# Altium PCB MiniRobot.PcbDoc.old.PcbDoc
Units mm, origin at the board's own origin, x right, y up, seen from the top; angles counter-clockwise.
Board outline 90 x 85 mm, 2 copper layers (Top Layer, Bottom Layer); 42 components, 47 nets, 170 pads, 4 vias.
Unrouted connection lines stored in the file: 78.
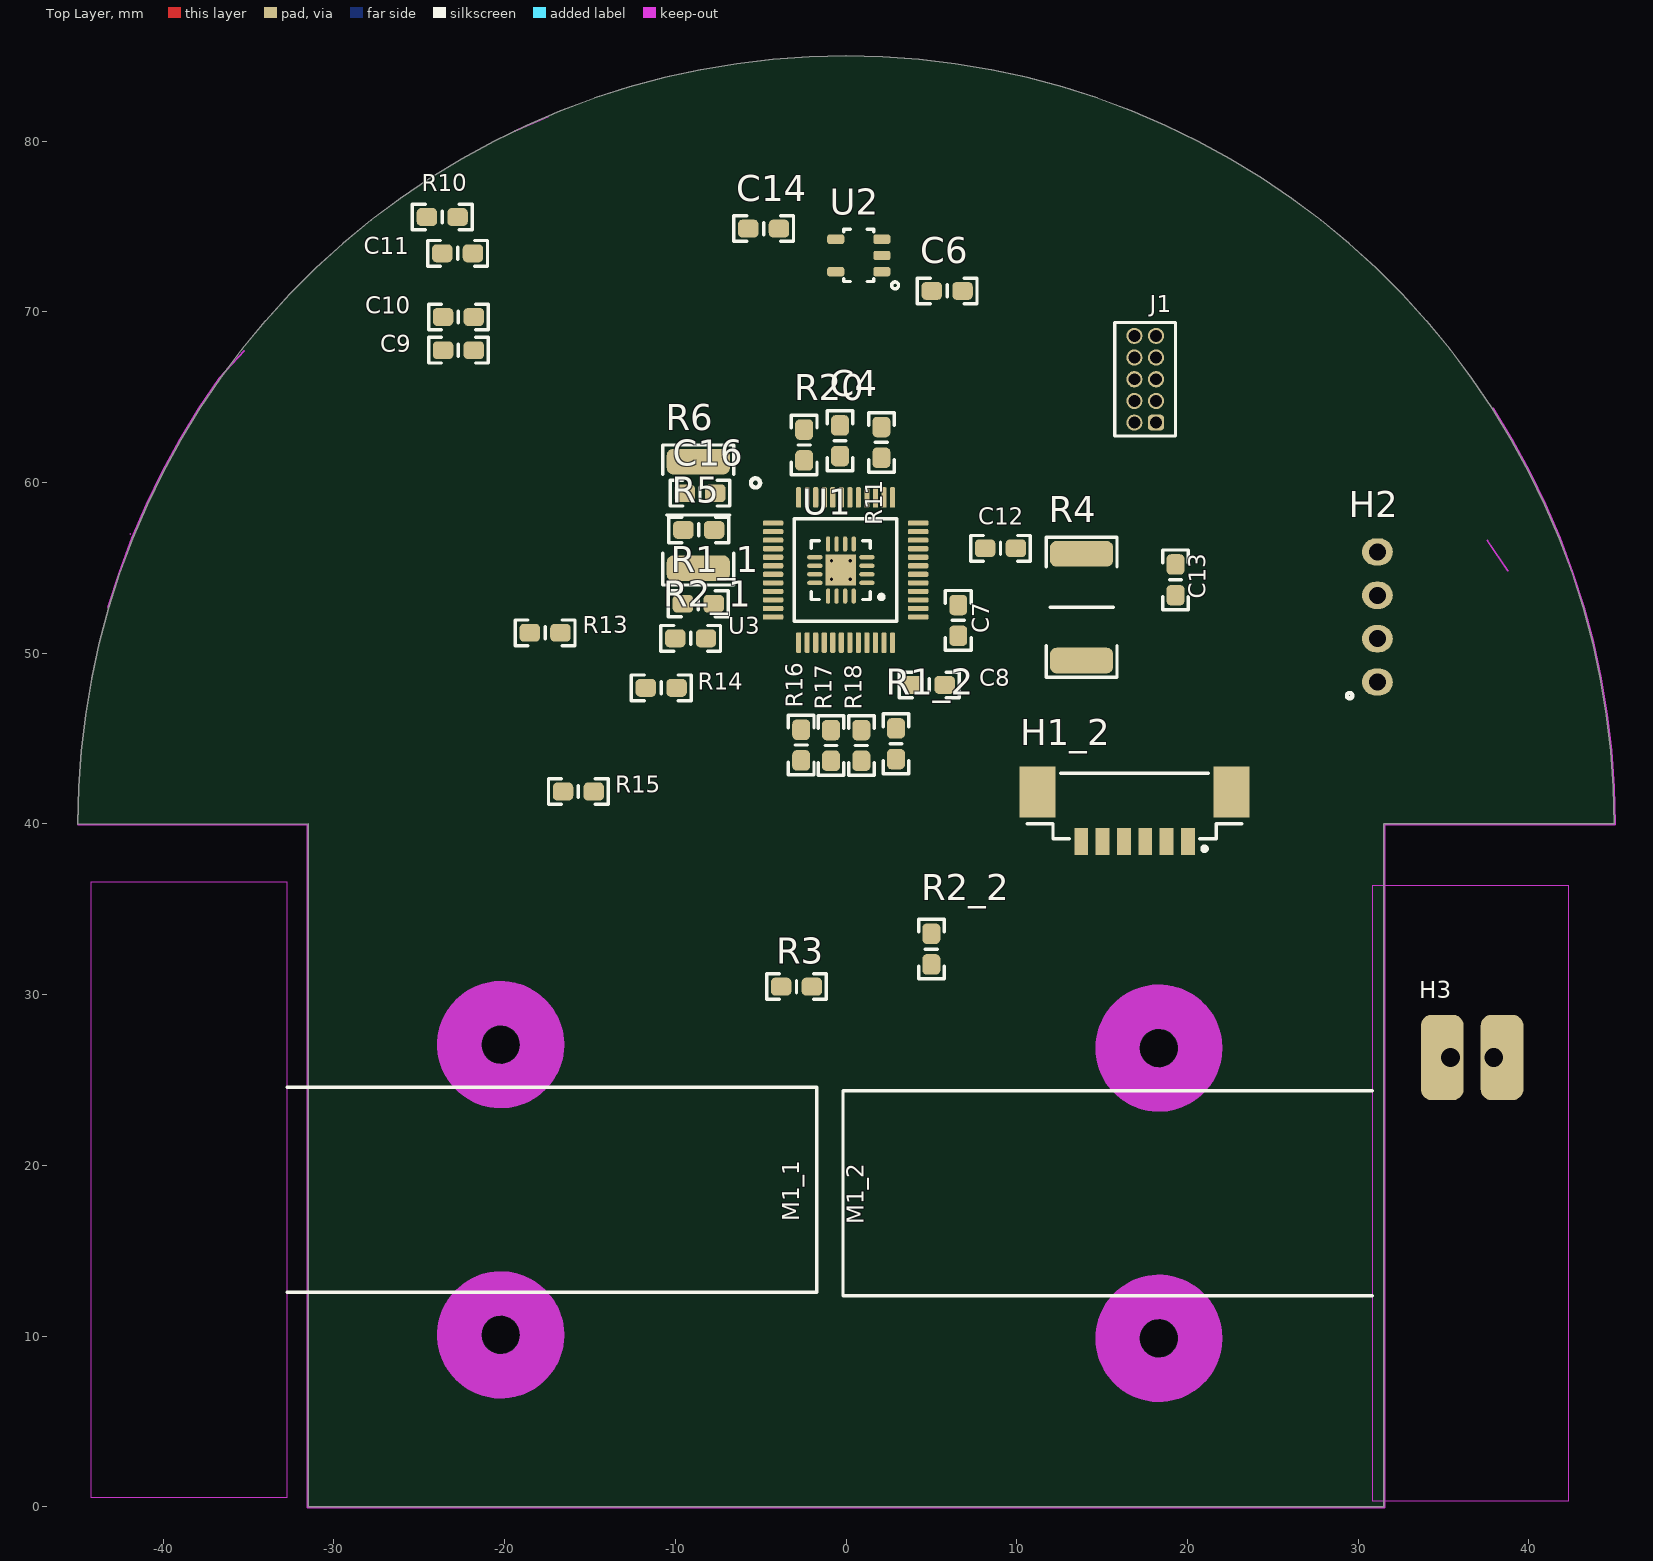
[diagram p0: Top Layer view]
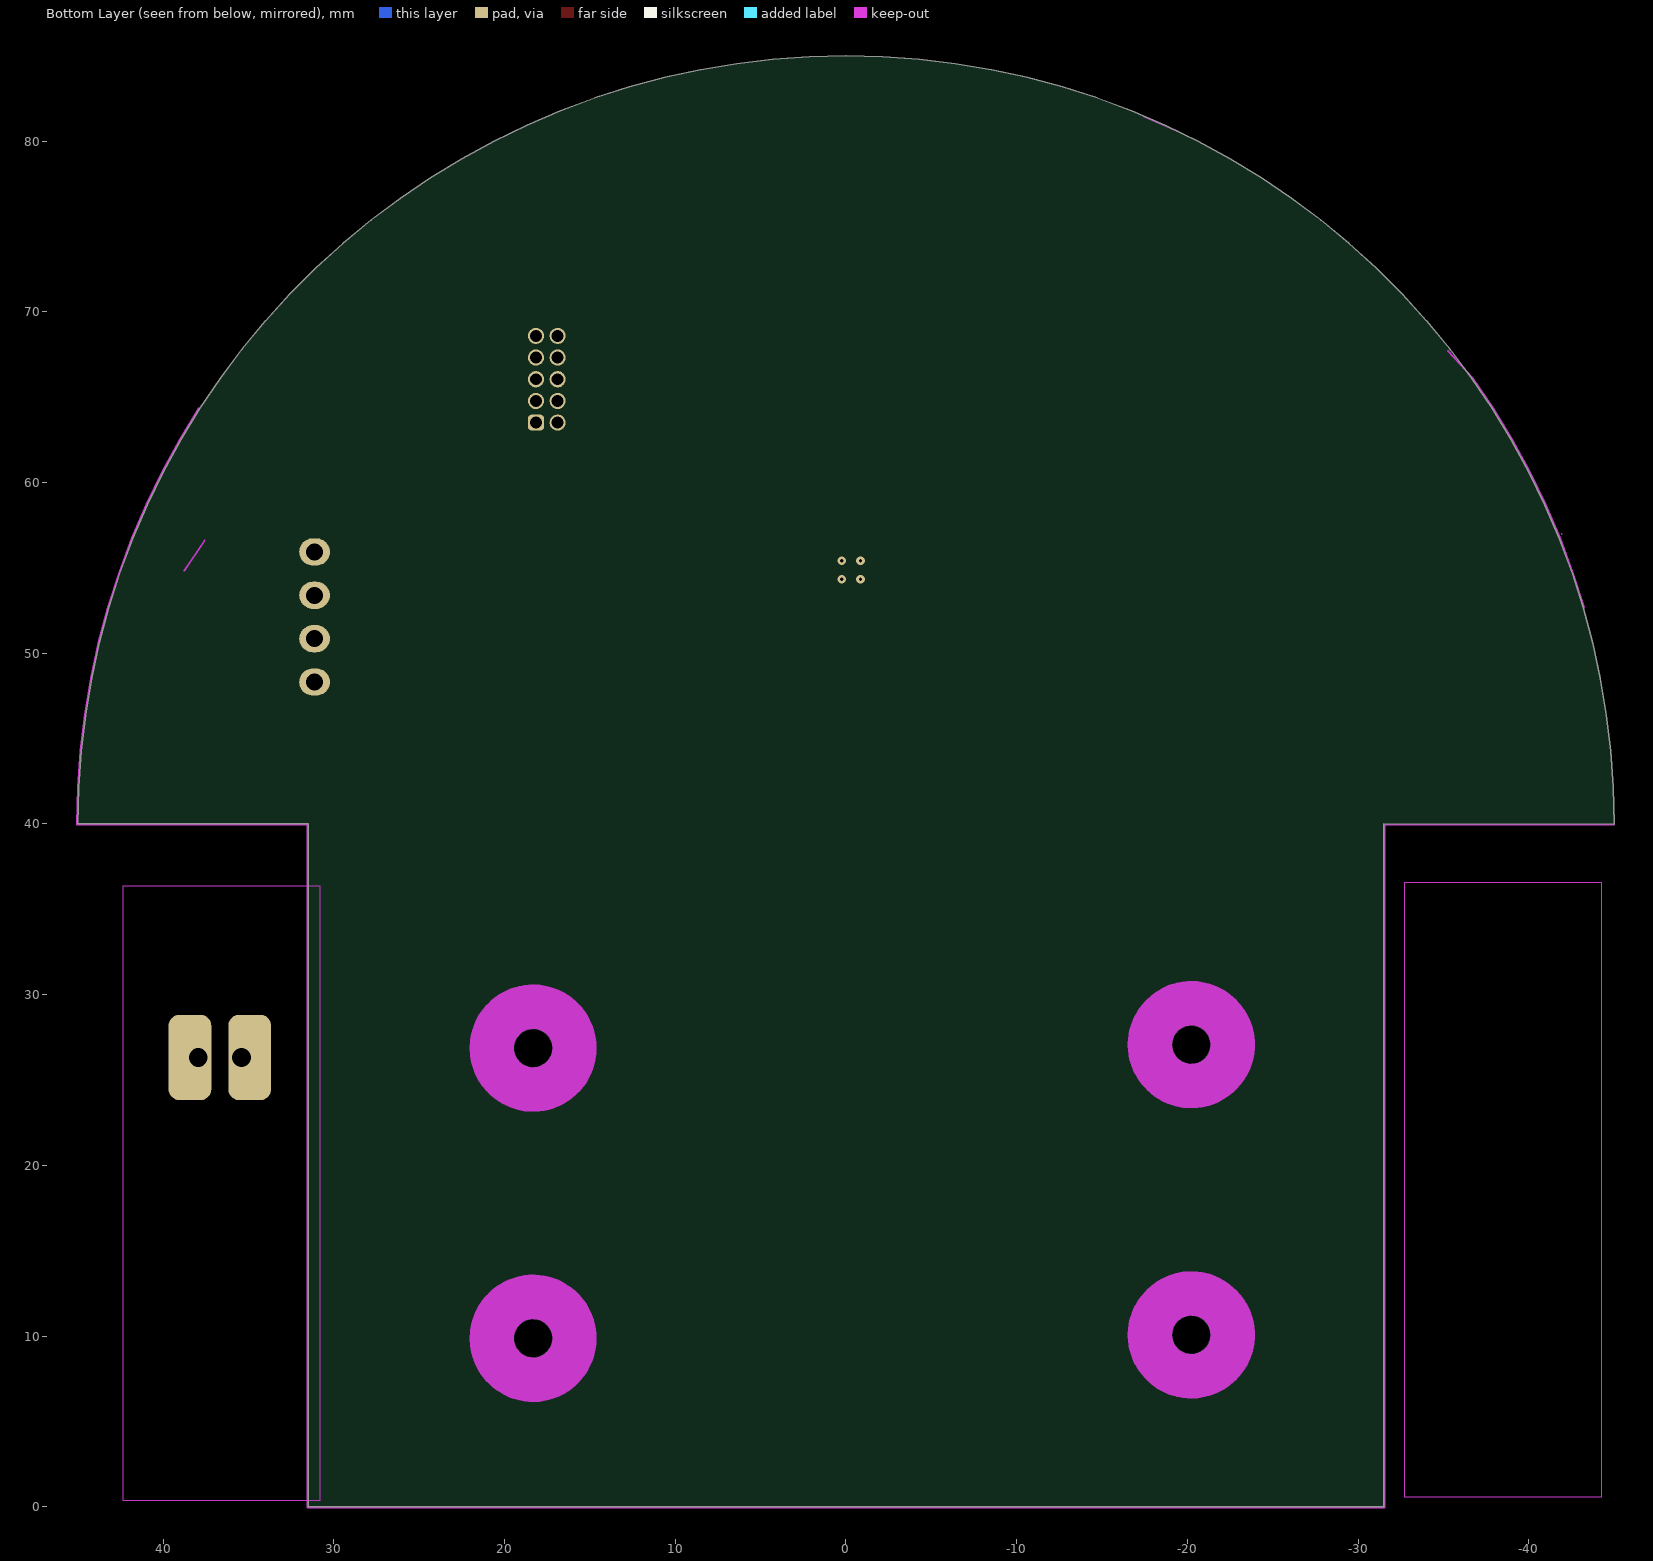
[diagram p1: Bottom Layer view, seen from below]

## Layer stack, top to bottom
Top Solder: solder mask 0.0102, Solder Resist, Dk 3.5
Top Layer: signal copper 0.0356
Dielectric 1: dielectric 0.32, FR-4, Dk 4.8
Bottom Layer: signal copper 0.0356
Bottom Solder: solder mask 0.0102, Solder Resist, Dk 3.5

## Board outline
45,40 44.949,42.141 44.796,44.278 44.542,46.404 44.187,48.516 43.732,50.609 43.177,52.678 42.525,54.718 41.777,56.725 40.933,58.694 39.998,60.62 38.971,62.5 37.856,64.329 36.656,66.103 35.372,67.817 34.009,69.469 32.568,71.054 31.054,72.568 29.469,74.009 27.817,75.372 26.103,76.656 24.329,77.856 22.5,78.971 20.62,79.998 18.694,80.933 16.725,81.777 14.718,82.525 12.678,83.177 10.609,83.732 8.516,84.187 6.404,84.542 4.278,84.796 2.141,84.949 0,85 -2.141,84.949 -4.278,84.796 -6.404,84.542 -8.516,84.187 -10.609,83.732 -12.678,83.177 -14.718,82.525 -16.725,81.777 -18.694,80.933 -20.62,79.998 -22.5,78.971 -24.329,77.856 -26.103,76.656 -27.817,75.372 -29.469,74.009 -31.054,72.568 -32.568,71.054 -34.009,69.469 -35.372,67.817 -36.656,66.103 -37.856,64.329 -38.971,62.5 -39.998,60.62 -40.933,58.694 -41.777,56.725 -42.525,54.718 -43.177,52.678 -43.732,50.609 -44.187,48.516 -44.542,46.404 -44.796,44.278 -44.949,42.141 -45,40 -31.5,40 -31.5,0 31.5,0 31.5,40

## Design rules (kind name [scope] priority, off if disabled: settings)
Clearance [All] p1: gap=0.125
ComponentClearance [All] p1 off: gap=0.254 collisioncheckmode=3 verticalgap=0.254 showdistances=FALSE
HoleSize [All] p1: absolutevalues=TRUE maxlimit=10 minlimit=0.19 maxpercent=80.000 minpercent=20.000
MinimumAnnularRing [All] p1: minimumring=0.076
MinimumSolderMaskSliver [All] p1: minsoldermaskwidth=0.154
PolygonConnect [All] p1: connectstyle=Relief reliefconductorwidth=0.254 reliefentries=4 polygonreliefangle="45 Angle" airgapwidth=0.254
RoomDefinition U_MR_RangeSensor [InComponentClass('U_MR_RangeSensor')] p1: confinementstyle=ConfineIn formatcopy=TRUE lockcomponents=FALSE outline 25.527,2.324 25.527,20.95 -22.75,20.95 -22.75,2.324
RoomDefinition U_MR_Motor_Control [InComponentClass('U_MR_Motor_Control')] p2: confinementstyle=ConfineIn formatcopy=TRUE lockcomponents=FALSE outline -299.925,-25.175 -249.125,-25.175 -249.125,0.225 -299.925,0.225
RoomDefinition U_MR_UartConnector [InComponentClass('U_MR_UartConnector')] p3: confinementstyle=ConfineIn formatcopy=TRUE lockcomponents=FALSE outline 24.5,45.67 39.4,45.67 39.4,58.67 24.5,58.67
RoomDefinition U_MR_Power [InComponentClass('U_MR_Power')] p4: confinementstyle=ConfineIn formatcopy=TRUE lockcomponents=FALSE outline -6.9,69.925 8.325,69.925 8.325,76.45 -6.9,76.45
RoutingVias [All] p1: holewidth=0.25 width=0.6 viastyle="Through Hole" minholewidth=0.2 minwidth=0.45 maxholewidth=1 maxwidth=2
SilkToSilkClearance [All] p1: silktosilkclearance=0.154
SilkToSolderMaskClearance [IsPad] p1: minsilkscreentomaskgap=0 clearancetoexposedcopper=TRUE
SolderMaskExpansion SolderMask_Via [IsVia] p1: expansion=-100
SolderMaskExpansion [All] p2: expansion=0.102
Width [All] p1: maxlimit=10 minlimit=0.075 preferedwidth=0.2 minimp=50.000000 maximp=50.000000 favimp=50.000000
24 further rules are at their usual default settings.

## Classes and differential pairs
component class U_MR_Mcu: C7 C8 C9 C10 C11 C12 C13 J1 R10 R11 R13 R14 R15 R16 R17 R18 U3
component class LeftMotor: M1_1 R1_1 R2_1
component class RightMotor: H1_2 M1_2 R1_2 R2_2
component class U_MR_Power: C6 C14 H3 U2
channel class MR_Motor: LeftMotor RightMotor
component class U_MR_Motor_Control: C2 C3 C4 R3 R4 R5 R6 U1
component class U_MR_RangeSensor: C15 M2 R12
component class U_MR_UartConnector: C16 H2 R20

## Components (designator, comment, footprint, x,y, rotation, side; value= is the part's Value field where it differs from the comment)
C2 "CerCap" 0603_CAP_LD -3.678,105.8 r180 top
C3 "CerCap" 0603_CAP_LD -8.628,105.8 r180 top
C4 "CerCap" 0603_CAP_LD -0.35,62.45 r90 top
C6 "CerCap" 0603_CAP_LD 5.925,71.225 r180 top
C7 "CerCap" 0603_CAP_LD 6.575,51.925 r270 top
C8 "CerCap" 0603_CAP_LD 4.875,48.15 r180 top
C9 "CerCap" 0603_CAP_LD -22.7,67.75 r0 top
C10 "CerCap" 0603_CAP_LD -22.7,69.7 r0 top
C11 "CerCap" 0603_CAP_LD -22.75,73.425 r0 top
C12 "CerCap" 0603_CAP_LD 9.05,56.15 r180 top
C13 "CerCap" 0603_CAP_LD 19.3,54.3 r270 top
C14 "CerCap" 0603_CAP_LD -4.825,74.875 r0 top
C15 "CerCap" 0603_CAP_LD -80.996,-83.828 r270 top
C16 "CerCap" 0603_CAP_LD -8.55,59.375 r180 top
H1_2 "Header" HEADER_1X6_PICOBLADE_653106124022 16.9,41.05 r180 top (schematic designator H1)
H2 "Header" "HE14 1x4 Straight" 31.125,52.125 r90 top
H3 "CustomBatteryConnector" CUSTOMBATTERYCONNECTOR 36.675,26.325 r0 top
J1 "Debug" 62201021121 17.525,66.05 r90 top
M1_1 "MotorGroup" MOTORGROUP -1.725,18.575 r0 top locked (schematic designator M1)
M1_2 "MotorGroup" MOTORGROUP -0.175,18.375 r180 top locked (schematic designator M1)
M2 "Ultrasonic Range Sensor" HC-SR04 62.7,8.525 r270 top
R1_1 "Resistor" 0603_RES_LD -8.65,52.9 r0 top (schematic designator R1)
R1_2 "Resistor" 0603_RES_LD 2.925,44.7 r270 top (schematic designator R1)
R2_1 "Resistor" 0603_RES_LD -9.1,50.875 r180 top (schematic designator R2)
R2_2 "Resistor" 0603_RES_LD 5,32.675 r90 top (schematic designator R2)
R3 "Resistor" 0603_RES_LD -2.9,30.475 r180 top
R4 "Resistor" 2512_RES_LD 13.8,52.7 r270 top
R5 "Resistor" 0603_RES_LD -8.625,57.225 r0 top
R6 "Resistor" 2512_RES_LD -8.65,58.1 r270 top
R10 "Resistor" 0603_RES_LD -23.65,75.55 r180 top
R11 "Resistor" 0603_RES_LD 2.075,62.35 r90 top
R12 "Resistor" 0603_RES_LD -24.571,-121.768 r270 top
R13 "Resistor" 0603_RES_LD -17.625,51.2 r0 top
R14 "Resistor" 0603_RES_LD -10.825,47.975 r0 top
R15 "Resistor" 0603_RES_LD -15.675,41.9 r0 top
R16 "Resistor" 0603_RES_LD -2.625,44.625 r90 top
R17 "Resistor" 0603_RES_LD -0.875,44.6 r90 top
R18 "Resistor" 0603_RES_LD 0.9,44.6 r90 top
R20 "Resistor" 0603_RES_LD -2.45,62.2 r270 top
U1 "Dual Brush Motor Driver" QFN-STSPIN240 -0.3,54.875 r180 top
U2 "Low noise, Low Iq LDO" LP5907 0.75,73.3 r180 top
U3 "Microcontroller" STM32_LQFP48 -0.025,54.875 r0 top

## Footprints (in the part's own frame and the unit in brackets; to place one, negate y for a bottom-side part, rotate by r counter-clockwise, add the part's x,y. Pads: shape width x height; smd on the part's side, far side on the other; paste and mask are expansions set on the pad)
0603_CAP_LD [mm] "0603 Capacitor Low Density"
  rrect50% 1.2x1.05 smd: 1(-0.9,0) 2(0.9,0)
  silkscreen extent -1.75,-0.75 1.75,0.75
0603_RES_LD [mm] "0603 Resistor Low Density"
  rrect50% 1.2x1.05 smd: 1(-0.9,0) 2(0.9,0)
  silkscreen extent -1.75,-0.75 1.75,0.75
2512_RES_LD [mm] "2512 Low Density Resistor"
  rrect50% 1.5x3.7 smd: 1(-3.125,0) 2(3.125,0)
  silkscreen extent -4.1,-2.07 4.1,2.07
62201021121 [mm] "Pin Header, pitch 1.27 mm, THT, Vertical, dual row, 10p"
  rrect50% 0.95x0.95 hole 0.7: 1(-2.54,-0.635)
  round 0.95 hole 0.7: 2(-2.54,0.635) 3(-1.27,-0.635) 4(-1.27,0.635) 5(0,-0.635) 6(0,0.635) 7(1.27,-0.635) 8(1.27,0.635) 9(2.54,-0.635) 10(2.54,0.635)
  silkscreen extent -3.32,-1.78 3.32,1.78, body extent -3.17,-1.7 3.18,1.7, height 5.33
CUSTOMBATTERYCONNECTOR [mm] "CustomBatteryConnector"
  rrect50% 2.5x5 smd paste-100: +(-1.75,0) -(1.75,0)
  rrect50% 2.5x5 smd far side paste-100: +(-1.75,0) -(1.75,0)
  round 1.5 hole 1.1 unplated paste-100: +(-1.27,0) -(1.27,0)
HC-SR04 [mm] "HC-SR04"
  round 1.5 hole 1.1 unplated: 1(-3.81,0) 2(-1.27,0) 3(1.27,0) 4(3.81,0)
  silkscreen extent -22.5,2.38 22.5,17.38, body extent -22.72,-0.3 22.72,17.49, height 20
"HE14 1x4 Straight" [mm] "Connector HE14 Straight 1x4"
  oval 1.6x1.8 hole 1 mask+0.102: 1(-3.81,0) 2(-1.27,0) 3(1.27,0) 4(3.81,0)
  silkscreen extent -4.77,1.47 -4.45,1.78, body extent -5.08,-1.27 5.08,1.27, height 9.5
HEADER_1X6_PICOBLADE_653106124022 [mm] "1.25mm SMT Male Vertical Shrouded Header, 6p"
  rect 0.81x1.6 smd: 1(-3.125,2.07) 2(-1.875,2.07) 3(-0.625,2.07) 4(0.625,2.07) 5(1.875,2.07) 6(3.125,2.07)
  rect 2.1x3 smd: ""(-5.675,-0.83) ""(5.675,-0.83)
  silkscreen extent -6.27,-1.92 6.27,2.62
LP5907 [mm] "LP5907 SOT23"
  rrect50% 1x0.55 smd mask+0.102: 1(-1.35,0.95) 2(-1.35,0) 3(-1.35,-0.95) 4(1.35,-0.95) 5(1.35,0.95)
  silkscreen extent -2.33,-1.52 0.88,1.95
MOTORGROUP [mm]
  round 0 hole 2.2 unplated paste+0 mask+0: 21(-18.5,8.5) 22(-18.5,-8.5)
  Keep-Out Layer pour cut-out: -31,-18 -31,18 -42.5,18 -42.5,-18
  Keep-Out Layer circle w2.6: c-18.5,-8.5 r2.425
  Keep-Out Layer circle w2.6: c-18.5,8.5 r2.425
  silkscreen extent -31,-6 0,6
QFN-STSPIN240 [mm] "QFN, 16-Leads, Body 3,00x3,00mm, Pitch 0,50mm, Thermal Pad 1,80x1,80mm, IPC Low Density"
  oval 0.9x0.25 smd: 1(-1.525,0.75) 2(-1.525,0.25) 3(-1.525,-0.25) 4(-1.525,-0.75) 9(1.525,-0.75) 10(1.525,-0.25) 11(1.525,0.25) 12(1.525,0.75)
  oval 0.25x0.9 smd: 5(-0.75,-1.525) 6(-0.25,-1.525) 7(0.25,-1.525) 8(0.75,-1.525) 13(0.75,1.525) 14(0.25,1.525) 15(-0.25,1.525) 16(-0.75,1.525)
  rect 1.8x1.8 smd: 17(0,0)
  silkscreen extent -2.5,-1.73 1.73,1.73
STM32_LQFP48 [mm]
  rrect50% 1.2x0.3 smd: 1(-4.25,2.75) 2(-4.25,2.25) 3(-4.25,1.75) 4(-4.25,1.25) 5(-4.25,0.75) 6(-4.25,0.25) 7(-4.25,-0.25) 8(-4.25,-0.75) 9(-4.25,-1.25) 10(-4.25,-1.75) 11(-4.25,-2.25) 12(-4.25,-2.75) 25(4.25,-2.75) 26(4.25,-2.25) 27(4.25,-1.75) 28(4.25,-1.25) 29(4.25,-0.75) 30(4.25,-0.25) 31(4.25,0.25) 32(4.25,0.75) 33(4.25,1.25) 34(4.25,1.75) 35(4.25,2.25) 36(4.25,2.75)
  rrect50% 0.3x1.2 smd: 13(-2.75,-4.25) 14(-2.25,-4.25) 15(-1.75,-4.25) 16(-1.25,-4.25) 17(-0.75,-4.25) 18(-0.25,-4.25) 19(0.25,-4.25) 20(0.75,-4.25) 21(1.25,-4.25) 22(1.75,-4.25) 23(2.25,-4.25) 24(2.75,-4.25) 37(2.75,4.25) 38(2.25,4.25) 39(1.75,4.25) 40(1.25,4.25) 41(0.75,4.25) 42(0.25,4.25) 43(-0.25,4.25) 44(-0.75,4.25) 45(-1.25,4.25) 46(-1.75,4.25) 47(-2.25,4.25) 48(-2.75,4.25)
  silkscreen extent -5.54,-3 3,5.37

## Part data
C2 C3 C4 C6 C7 C8 C9 C10 C11 C12 C13 C14 C15 C16: "Ceramic Capacitor"
H1_2: library part Header_6x1, "Header 6x1 Pins"
H2: library part Header_4x1, "Header 4x1 PIns"
H3: library part BatteryConnector, "Custom Battery Connector"
J1: library part Cortex_10x2, "Cortex 10 pins Debug Connector"
M1_1 M1_2: library part Motor
M2: library part HC-SR04
U1: library part STSPIN240, "ST Dual Motor Driver"
U2: library part LP5907, "LP5907 Low Noise Low Iq LDO"
U3: library part STM32F303CBT6, "STM32F303 Microcontroller"

## Via types
v1: diameter 0.5, hole 0.2, Top Layer to Bottom Layer, 4 vias

## Nets (pads, with @x,y where several pads share a name; then routed paths per layer and width w, separated by ;. In a path a pad name is that pad's centre, name@x,y a point inside that pad or via, vN(x,y) a via of type N, cw(c..) or ccw(c..) an arc to the next point about the centre after c; other vN are vias at no path point)
3V3: C6.2 C7.2 C8.2 C9.2 C10.2 C11.2 C12.2 C13.2 J1.1 M2.4 R5.2 U2.5 U3.1 U3.9 U3.24 U3.36 U3.48
BOOT0: R10.2 U3.44
GND: C2.1 C3.1 C4.2 C6.1 C7.1 C8.1 C9.1 C10.1 C11.1 C12.1 C13.1 C14.1 C15.1 C16.2 H1_2.2 H2.2 H3.- J1.3 J1.5 J1.9 M2.1 R4.2 R6.1 R10.1 U1.7 U2.2 U3.8 U3.23 U3.35 U3.47
NetC4_1: C4.1 R3.2 U1.13
NetC5_1: 
NetH1_1_1: U1.3
NetH1_1_3: R1_1.2
NetH1_1_4: R2_1.2
NetH1_1_6: U1.5
NetH1_2_1: H1_2.1 U1.10
NetH1_2_3: H1_2.3 R1_2.2
NetH1_2_4: H1_2.4 R2_2.2
NetH1_2_6: H1_2.6 U1.8
NetH2_3: H2.3 R20.2
NetH2_4: H2.4 R11.1
NetM2_2: M2.2 R12.2
NetM2_3: M2.3 R12.1 U3.45
NetR1_1_1: R1_1.1 U3.10
NetR1_2_1: R1_2.1 U3.16
NetR2_1_1: R2_1.1 U3.11
NetR2_2_1: R2_2.1 U3.17
NetR3_1: R3.1 R18.1 U3.20
NetR4_1: R4.1 U1.4
NetR5_1: R5.1 U1.11
NetR6_2: R6.2 U1.9
NetR8_2: U1.12
NetR11_2: R11.2 U3.42
NetR13_1: R13.1 U1.2
NetR13_2: R13.2 U3.12
NetR14_1: R14.1 U1.16
NetR14_2: R14.2 U3.13
NetR15_1: R15.1 U1.1
NetR15_2: R15.2 U3.14
NetR16_1: R16.1 U1.15
NetR16_2: R16.2 U3.15
NetR17_1: R17.1 U1.14
NetR17_2: R17.2 U3.18
NetR18_2: R18.2 U3.19
NetR19_2: U3.46
NetR20_1: R20.1 U3.43
nRST: J1.10 U3.7
SWCLK: J1.4 U3.37
SWDIO: J1.2 U3.34
SWO: J1.6 U3.39
VBAAT: C16.1
VBATT: C2.2 C3.2 C14.2 H1_2.5 H2.1 H3.+ U1.6 U2.1 U2.3
VCC: C15.2
pads on no net: H1_2. J1.7 J1.8 M1_1.21 M1_1.22 M1_2.21 M1_2.22 U1.17 U2.4 U3.2 U3.3 U3.4 U3.5 U3.6 U3.21 U3.22 U3.25 U3.26 U3.27 U3.28 U3.29 U3.30 U3.31 U3.32 U3.33 U3.38 U3.40 U3.41
copper on no net:
  other v1: -0.85,54.325 0.25,54.325 -0.85,55.425 0.25,55.425

## Keep-outs
Keep-Out Layer:
  lines w0.1: -45,39.95 -31.55,39.95 -31.55,0 ; -43.225,52.693 -42.573,54.733 ; -35.257,67.715 -36.698,66.13 -37.898,64.357 ; -19.425,80.575 -17.456,81.418 ; 37.573,56.61 38.773,54.837 ; 37.899,64.355 39.014,62.526 ; 44.999,42.141 ccw(c44.949,42.141) 44.999,42.142 ; -42.573,54.733 cw(c-42.525,54.718) -42.572,54.736 ; -42.573,54.733 cw(c-42.525,54.718) -42.572,54.735 ; -42.572,54.736 ccw(c-42.525,54.718) -42.572,54.735 ; -42.572,54.735 -42.572,54.736 ; -42.572,54.736 -42.572,54.736 ; -42.572,54.736 -41.824,56.742 ; -41.928,56.981 ccw(c-41.969,56.953) -41.929,56.983 cw(c-41.969,56.953) -41.927,56.98 ; -41.928,56.981 -41.927,56.98 ; -41.823,56.742 cw(c-41.777,56.725) -41.823,56.744 ; -41.823,56.742 ccw(c-41.777,56.725) -41.823,56.742 ; -41.823,56.742 cw(c-41.777,56.725) -41.823,56.744 ; -41.824,56.742 -41.823,56.742 ; -41.823,56.742 -41.823,56.742 ; -41.823,56.744 -40.979,58.713 ; -40.979,58.713 cw(c-40.933,58.694) -40.978,58.716 ; -40.979,58.713 cw(c-40.933,58.694) -40.979,58.715 ; -40.979,58.715 cw(c-40.933,58.694) -40.978,58.716 ; -40.979,58.715 -40.978,58.716 ; -40.978,58.716 -40.978,58.716 ; -40.978,58.716 -40.043,60.642 ; -40.043,60.642 cw(c-39.998,60.62) -40.043,60.642 ; -40.043,60.642 cw(c-39.998,60.62) -40.042,60.644 ; -40.043,60.642 -40.043,60.642 ; -40.043,60.642 -40.043,60.642 ; -40.043,60.642 cw(c-39.998,60.62) -40.042,60.644 ; -40.042,60.644 -39.015,62.524 ; -39.015,62.524 cw(c-38.971,62.5) -39.014,62.526 ; -39.015,62.524 cw(c-38.971,62.5) -39.014,62.526 ; -39.014,62.526 -37.899,64.355 ; -37.899,64.355 cw(c-37.856,64.329) -37.898,64.357 ; -37.899,64.355 cw(c-37.856,64.329) -37.898,64.357 ; -37.898,64.357 -37.898,64.357 ; -31.55,0 ccw(c-31.5,0) -31.5,-0.05 ; -31.55,0 ccw(c-31.5,0) -31.5,-0.05 ; -31.5,-0.05 31.5,-0.05 ; -1.402,103.321 cw(c-1.369,103.284) -1.401,103.322 ; -1.402,103.321 ccw(c-1.369,103.284) -1.403,103.321 ; -1.402,103.321 cw(c-1.369,103.284) -1.401,103.322 ; -1.403,103.321 -1.402,103.321 ; -1.402,103.321 -1.402,103.321 ; -1.401,103.322 0.251,104.686 ; 0.251,104.686 cw(c0.283,104.647) 0.253,104.687 ccw(c0.283,104.647) 0.251,104.686 ; 31.5,-0.05 ccw(c31.5,0) 31.55,0 ; 31.5,-0.05 ccw(c31.5,0) 31.55,0 ; 31.55,0 31.55,39.95 45,39.95 ; 38.773,54.837 cw(c38.731,54.809) 38.774,54.835 ccw(c38.731,54.809) 38.773,54.837 38.773,54.837 ; 39.014,62.526 cw(c38.971,62.5) 39.015,62.524 ; 39.014,62.526 cw(c38.971,62.5) 39.015,62.524 ; 39.015,62.524 40.041,60.644 ; 40.041,60.644 cw(c39.998,60.62) 40.043,60.642 ; 40.041,60.644 cw(c39.998,60.62) 40.042,60.642 ; 40.043,60.642 ccw(c39.998,60.62) 40.042,60.642 ; 40.043,60.642 40.978,58.716 ; 40.043,60.642 40.043,60.642 ; 40.043,60.642 40.042,60.642 ; 40.979,58.715 cw(c40.933,58.694) 40.979,58.713 ; 40.979,58.715 ccw(c40.933,58.694) 40.978,58.716 ; 40.979,58.715 40.978,58.716 ; 40.978,58.716 cw(c40.933,58.694) 40.979,58.713 ; 40.978,58.716 40.978,58.716 ; 40.979,58.713 41.823,56.745 ; 41.823,56.742 ccw(c41.777,56.725) 41.823,56.745 ; 41.823,56.742 ccw(c41.777,56.725) 41.823,56.742 ; 41.823,56.742 ccw(c41.777,56.725) 41.823,56.745 ; 41.823,56.742 42.572,54.736 ; 41.823,56.742 41.823,56.742 ; 41.823,56.742 41.823,56.742 ; 42.573,54.733 ccw(c42.525,54.718) 42.572,54.735 ; 42.573,54.733 ccw(c42.525,54.718) 42.572,54.736 ; 42.573,54.733 43.225,52.693 ; 42.572,54.735 ccw(c42.525,54.718) 42.572,54.736 ; 42.572,54.736 42.572,54.735 ; 42.572,54.736 42.572,54.736 ; 43.226,52.691 ccw(c43.177,52.678) 43.225,52.693 ; 43.226,52.691 ccw(c43.177,52.678) 43.225,52.691 ; 43.225,52.691 ccw(c43.177,52.678) 43.225,52.693 ; 43.226,52.691 43.78,50.622 ; 43.226,52.691 43.226,52.691 ; 43.225,52.691 43.226,52.691 ; 43.78,50.62 ccw(c43.732,50.609) 43.78,50.622 ; 43.78,50.62 ccw(c43.732,50.609) 43.78,50.62 ; 43.78,50.62 ccw(c43.732,50.609) 43.78,50.622 ; 43.78,50.62 44.236,48.527 ; 43.78,50.62 43.78,50.62 ; 43.78,50.62 43.78,50.62 ; 43.78,50.622 ccw(c43.732,50.609) 43.78,50.622 ; 43.78,50.622 43.78,50.622 ; 43.78,50.622 43.78,50.622 ; 44.236,48.525 ccw(c44.187,48.516) 44.236,48.527 ; 44.236,48.524 ccw(c44.187,48.516) 44.236,48.527 ; 44.236,48.524 44.591,46.413 ; 44.236,48.525 44.236,48.524 ; 44.236,48.527 ccw(c44.187,48.516) 44.236,48.527 ; 44.236,48.527 44.236,48.527 ; 44.236,48.527 44.236,48.527 ; 44.592,46.41 ccw(c44.542,46.404) 44.591,46.413 ; 44.592,46.41 ccw(c44.542,46.404) 44.591,46.412 ; 44.592,46.41 44.846,44.283 ; 44.591,46.413 44.591,46.412 ; 44.846,44.281 ccw(c44.796,44.278) 44.846,44.283 ; 44.846,44.281 ccw(c44.796,44.278) 44.846,44.283 ; 44.846,44.281 44.999,42.145 ; 45,39.95 ccw(c45,40) 45.05,40 ; 45,39.95 ccw(c45,40) 45.05,40 ; 44.999,42.142 ccw(c44.949,42.141) 44.999,42.145 ; 44.999,42.142 ccw(c44.949,42.141) 44.999,42.145 ; 44.999,42.142 45.05,40.002 ; 44.999,42.142 44.999,42.142 ; 45.05,40 ccw(c45,40) 45.05,40.002 ; 45.05,40 ccw(c45,40) 45.05,40.001 ; 45.05,40.002 45.05,40.001 ; 102.4,40.252 ccw(c102.45,40.25) 102.45,40.2 cw(c102.45,40.25) 102.4,40.251 ; 102.4,40.251 102.4,40.252 ; 102.4,40.252 102.451,42.392 ; 102.451,42.392 cw(c102.501,42.391) 102.451,42.395 ; 102.451,42.392 102.451,42.392 cw(c102.501,42.391) 102.451,42.395 ; 102.451,42.395 102.604,44.531 ; 102.604,44.531 cw(c102.654,44.528) 102.604,44.533 ; 102.604,44.531 cw(c102.654,44.528) 102.604,44.533 ; 102.604,44.533 102.858,46.66 ; 102.858,46.66 cw(c102.908,46.654) 102.859,46.662 ; 102.858,46.66 cw(c102.908,46.654) 102.859,46.663 ; 102.859,46.662 102.859,46.663 ; 102.859,46.663 103.214,48.774 ; 103.214,48.774 cw(c103.263,48.766) 103.214,48.777 ; 103.214,48.775 cw(c103.263,48.766) 103.214,48.777 ; 103.214,48.774 103.214,48.775 ; 103.214,48.777 ccw(c103.263,48.766) 103.214,48.777 ; 103.214,48.777 103.214,48.777 ; 103.214,48.777 103.214,48.777 ; 103.214,48.777 103.67,50.87 ; 103.67,50.87 cw(c103.718,50.859) 103.67,50.872 ; 103.67,50.87 ccw(c103.718,50.859) 103.67,50.87 ; 103.67,50.87 cw(c103.718,50.859) 103.67,50.872 ; 103.67,50.87 103.67,50.87 ; 103.67,50.87 103.67,50.87 ; 103.67,50.872 ccw(c103.718,50.859) 103.67,50.872 ; 103.67,50.872 103.67,50.872 ; 103.67,50.872 103.67,50.872 ; 103.67,50.872 104.224,52.941 ; 104.224,52.941 cw(c104.273,52.928) 104.225,52.943 ccw(c104.273,52.928) 104.224,52.941 ; 104.224,52.941 ccw(c104.273,52.928) 104.224,52.941 ; 104.224,52.941 104.224,52.941 ; 104.224,52.941 104.224,52.941 ; 104.236,58.949 cw(c104.197,58.917) 104.237,58.947 ccw(c104.197,58.917) 104.236,58.949

## Silkscreen, mask and mechanical layers (free items; w line width, h text height)
Mechanical 1:
  drawing of 163 lines, arcs and shapes, not listed